# Altium PCB LinkIt Smart 7688 Duo.PcbDoc (part 3 of 3)
Units mil, origin at the board's own origin, x right, y up, seen from the top; angles counter-clockwise.
Board outline 2393.7 x 1023.62 mil, 4 copper layers (Top Layer, Mid Layer 1, Mid Layer 2, Bottom Layer), stack 40 mil thick; 184 components, 153 nets, 759 pads, 3026 vias.
Unrouted connection lines stored in the file: 1.
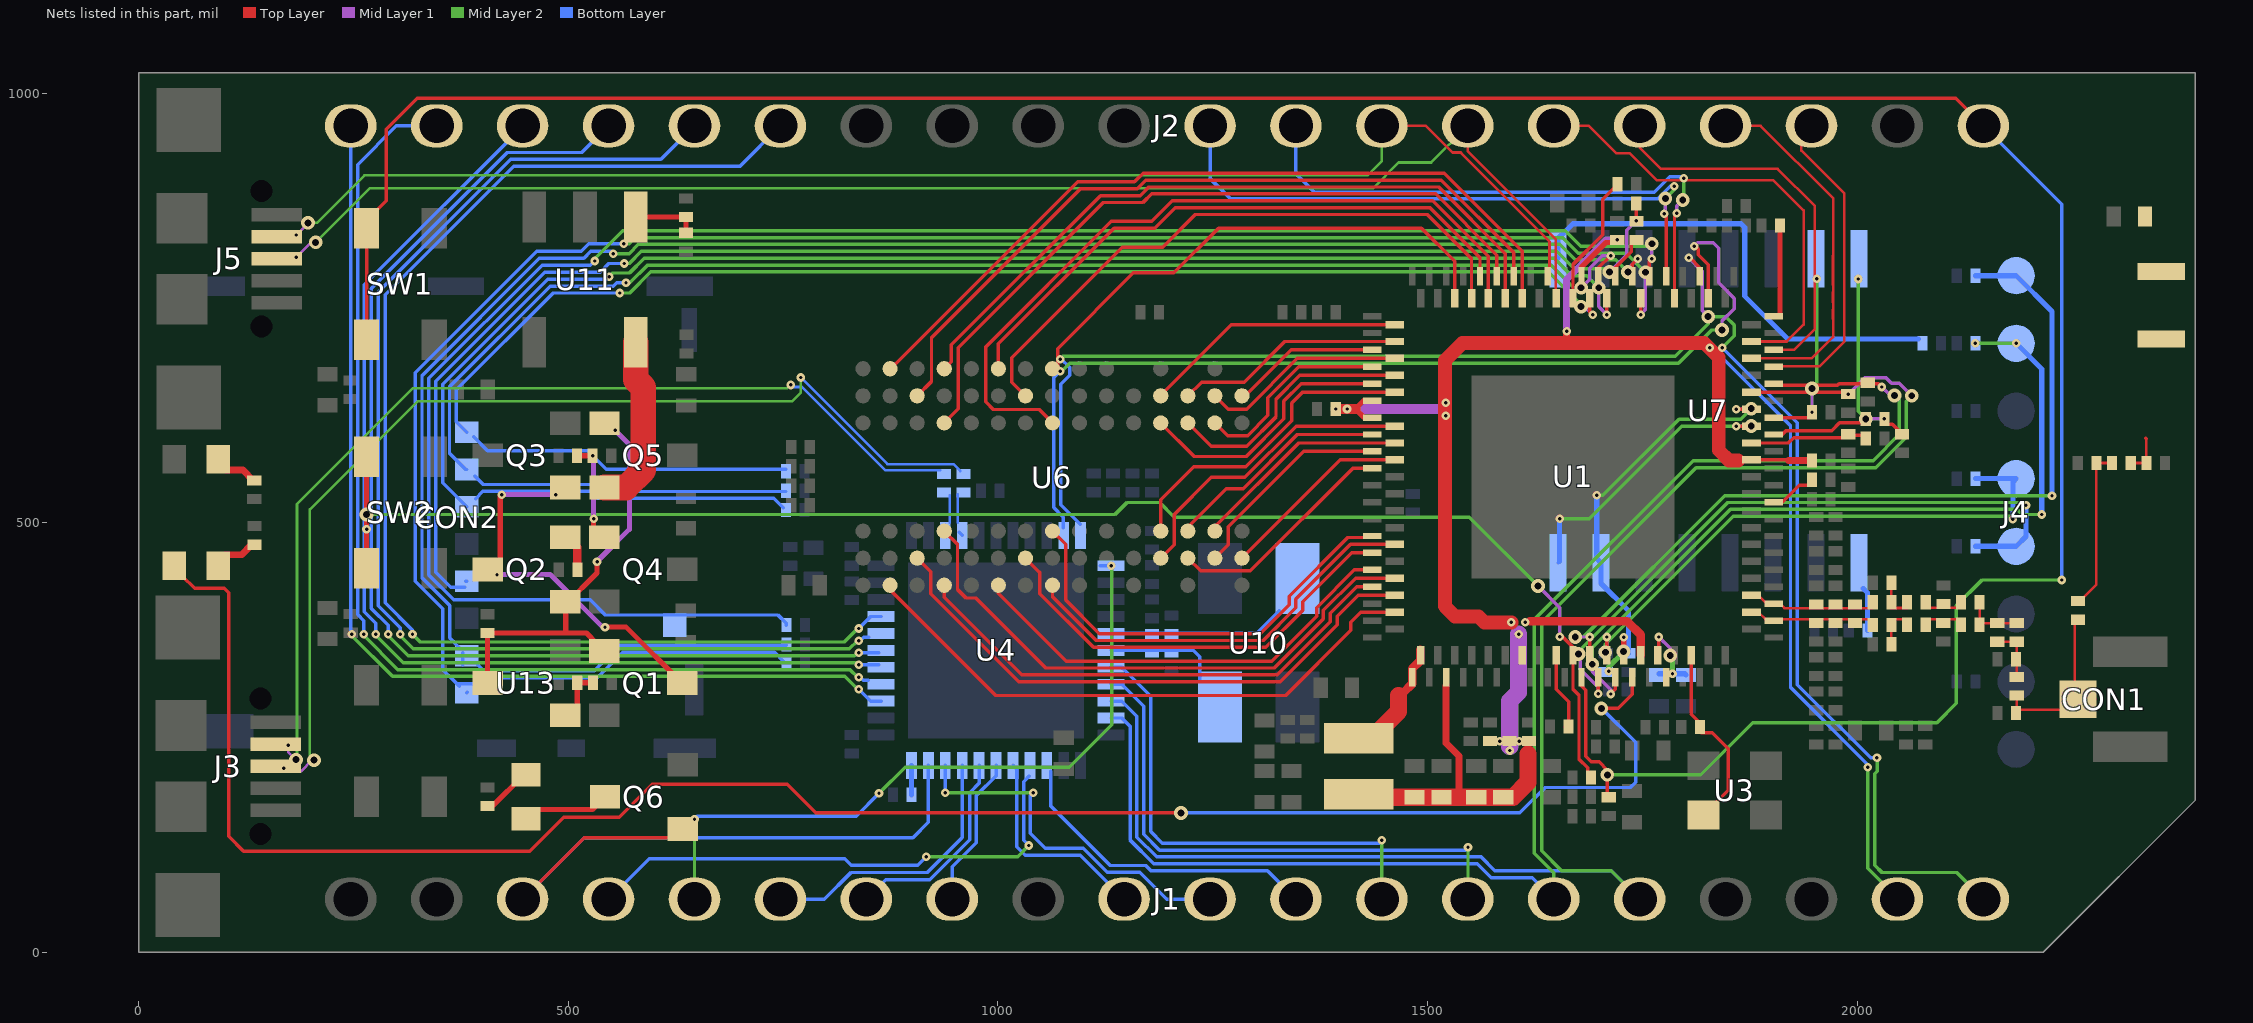
[diagram p5: the nets of this part, all layers, seen from the top]

## Via types
v1: diameter 10, hole 4, Mid Layer 2 to Bottom Layer, tented bottom, 916 vias
v2: diameter 10, hole 4, Top Layer to Mid Layer 1, tented top, 915 vias
v3: diameter 16, hole 8, Top Layer to Bottom Layer, tented both sides, 776 vias
v4: diameter 16, hole 8, Mid Layer 1 to Mid Layer 2, 419 vias

## Nets (pads, with @x,y where several pads share a name; then routed paths per layer and width w, separated by ;. In a path a pad name is that pad's centre, name@x,y a point inside that pad or via, vN(x,y) a via of type N, cw(c..) or ccw(c..) an arc to the next point about the centre after c; other vN are vias at no path point) (continued)
"GPIO16 / MDI_RP_P1": J1.22 U1.43 U4.10 | length 1937.6
  Top Layer w4: v2(1810.24,821.85) 1811.58,821.85 1815,818.43 1815,811.94 1826.77,800.16 U1.43@1826.77,761.02
  Mid Layer 1 w4: v2(1810.24,821.85) 1814.15,825.76 1832.51,825.76 1838.95,819.32 1838.95,778.96 1857.09,760.83 1856.72,760.46 1856.72,749.12 1842.72,735.12 v4(1842.72,724.21)
  Mid Layer 2 w4: v1(1072.36,676.22) 1074.21,676.22 1083.42,685.43 1792.04,685.43 1830.82,724.21 v4(1842.72,724.21) ; 1819.64,712.44 v1(1828.35,703.74) ; v1(2012.52,215.24) 2012.52,97.83 2046.85,63.5 J1.22@2046.85,61.81
  Bottom Layer w4: v1(1072.36,676.22) 1064.89,668.75 1064.89,517.6 1076.02,506.46 U4.10@1076.02,493.86 ; v1(1828.35,703.74) 1828.35,702.55 1838.36,692.54 1842.6,692.54 1922.4,612.74 1922.4,308.21 2012.52,218.1 v1(2012.52,215.24)
"GPIO17 / MDI_RN_P1": J1.21 U1.44 U4.11 | length 1989.2
  Top Layer w4: v2(1804,808.08) 1805.51,808.08 1816.93,796.65 U1.44@1816.93,786.81
  Mid Layer 1 w4: v2(1804,808.08) 1819.95,792.12 1819.95,746.39 v4(1826.57,739.76)
  Mid Layer 2 w4: v1(1072.48,690.32) 1075.59,693.43 1788.52,693.43 1826.57,731.48 v4(1826.57,739.76) 1846.96,739.76 1856.72,730.01 1856.72,717.35 v1(1842.91,703.54) ; v1@2021.65,226.18 v1(2023.03,226.18) 2023.52,225.69 2023.52,210.64 2020.52,207.64 2020.52,101.14 2028.85,92.81 2115.85,92.81 J1.21@2146.85,61.81
  Bottom Layer w4: v1(1072.48,690.32) 1073.82,690.32 1083.36,680.78 1083.36,671.36 1072.89,660.89 1072.89,520.93 U4.11@1095.87,497.95 ; v1(1842.91,703.54) 1930.43,616.03 1930.43,311.5 2015.75,226.18 v1(2023.03,226.18)
HOLD: R103.1 U7.1 | length 50.8
  Bottom Layer w6: U7.1@2007.05,423.31 2011.85,418.5 R103.1@2011.85,374.45
I2S_SDO: R2.2 U1.17 | length 50.5
  Top Layer w4: U1.17@1902.76,523.82 1912.8,523.82 1932.48,543.5 R2.2@1945.08,543.5
JCLK: J4.3 R25.2 U1.140 | length 771.9
  Top Layer w4: v2(1698.82,300.79) U1.140@1698.82,319.88
  Mid Layer 1 w4: v4(1675.59,347.24) 1677.73,345.1 1677.73,329.44 1698.82,308.35 v2(1698.82,300.79)
  Mid Layer 2 w4: v4(1675.59,347.24) 1675.59,349.7 1849.32,523.43 2193.5,523.43 v1(2196.46,520.47)
  Bottom Layer w6: R25.2@2137.6,472.44 J4.3@2185.04,472.44 2196.46,483.86 v1(2196.46,520.47)
JTDI: J4.6 R27.2 U1.142 | length 935.4
  Top Layer w4: v2(1713.19,300.59) 1718.5,305.91 U1.142@1718.5,319.88
  Mid Layer 1 w4: v4(1691.73,335.24) 1691.73,326.75 1713.19,305.29 v2(1713.19,300.59)
  Mid Layer 2 w4: v4(1691.73,335.24) 1691.73,354.53 1852.56,515.35 2185.99,515.35 2191.9,509.45 v1(2214.76,509.45) ; v1(2137.6,708.66) v1(2185.04,708.66)
  Bottom Layer w6: v1(2185.04,708.66) 2214.76,678.94 v1(2214.76,509.45)
JTMS: J4.4 R26.2 U1.141 | length 682.3
  Top Layer w4: U1.141@1708.66,345.67 v2(1708.66,366.93)
  Mid Layer 1 w4: v4(1706.89,349.21) 1708.66,350.98 v2(1708.66,366.93)
  Mid Layer 2 w4: v4(1706.89,349.21) 1706.89,358.37 1855.8,507.28 2178.15,507.28 v1(2181.3,504.13)
  Bottom Layer w6: R26.2@2137.6,551.18 J4.4@2185.04,551.18 2181.3,547.44 v1(2181.3,504.13)
JTRST_N: J4.7 R13.2 U1.139 | length 982.1
  Top Layer w4: U1.139@1688.98,345.67 v2(1688.98,366.93)
  Mid Layer 1 w4: v4(1671.85,366.93) v2(1688.98,366.93)
  Mid Layer 2 w4: v4(1671.85,366.93) 1681.51,366.93 1846.07,531.5 v1(2226.77,531.5)
  Bottom Layer w6: R13.2@2137.6,787.4 J4.7@2185.04,787.4 2226.77,745.67 v1(2226.77,531.5)
MADDR0: U1.80 U6.M8 | length 307
  Top Layer w4: U6.M8@1189.49,647.6 1189.49,648.43 1271.57,730.51 U1.80@1461.61,730.51
MADDR1: U1.88 U6.M3 | length 372.5
  Top Layer w4: U6.M3@1189.49,490.12 1189.49,526.5 1227.95,564.96 1288.27,564.96 1341.91,618.6 1341.91,639.27 1354.42,651.77 U1.88@1461.61,651.77
MADDR2: U1.87 U6.M7 | length 309.9
  Top Layer w4: U6.M7@1189.49,616.1 1189.49,615.78 1228.3,576.97 1288.97,576.97 1332.87,620.88 1332.87,641.54 1352.95,661.61 U1.87@1435.83,661.61
MADDR3: U1.97 U6.N2 | length 270.5
  Top Layer w4: U6.N2@1220.98,458.62 1235.84,443.76 1293.76,443.76 1413.19,563.19 U1.97@1435.83,563.19
MADDR4: U1.82 U6.N8 | length 266.8
  Top Layer w4: U6.N8@1220.98,647.6 1236.97,663.58 1286.61,663.58 1333.86,710.83 U1.82@1461.61,710.83
MADDR5: U1.93 U6.N3 | length 264.2
  Top Layer w4: U6.N3@1220.98,490.12 1220.98,494.8 1265.75,539.57 1285.51,539.57 1348.5,602.56 U1.93@1435.83,602.56
MADDR6: U1.86 U6.N7 | length 298.1
  Top Layer w4: U6.N7@1220.98,616.1 1248.11,588.98 1289.66,588.98 1323.62,622.94 1323.62,643.6 1351.47,671.46 U1.86@1461.61,671.46
MADDR7: U1.95 U6.P2 | length 247.1
  Top Layer w4: U6.P2@1252.48,458.62 1267.91,474.06 1267.91,495.07 1355.72,582.87 U1.95@1435.83,582.87
MADDR8: U1.84 U6.P8 | length 240
  Top Layer w4: U6.P8@1252.48,647.6 1267.99,632.09 1289.48,632.09 1348.53,691.14 U1.84@1461.61,691.14
MADDR9: U1.94 U6.P3 | length 254.6
  Top Layer w4: U6.P3@1252.48,490.12 1252.48,495.23 1349.97,592.72 U1.94@1461.61,592.72
MADDR10: U1.92 U6.M2 | length 356.4
  Top Layer w4: U6.M2@1189.49,458.62 1205.12,474.25 1205.12,509.45 1248.43,552.76 1287.38,552.76 1347.03,612.4 U1.92@1461.61,612.4
MADDR11: U1.85 U6.P7 | length 234.8
  Top Layer w4: U6.P7@1252.48,616.1 1267.34,601.24 1290.61,601.24 1314.17,624.8 1314.17,645.47 1350,681.3 U1.85@1435.83,681.3
MADDR12: U1.96 U6.R2 | length 225
  Top Layer w4: U6.R2@1283.98,458.62 1398.39,573.03 U1.96@1461.61,573.03
MADDR13: U1.83 U6.R8 | length 174
  Top Layer w4: U6.R8@1283.98,647.6 1287.95,647.6 1341.34,700.98 U1.83@1435.83,700.98
MDATA0: U1.71 U6.G8 | length 722.4
  Top Layer w4: U6.G8@1032.01,647.6 1016.14,663.46 1016.14,692.03 1144.71,820.6 1191.61,820.6 1229.64,858.62 1499.58,858.62 1551.18,807.02 U1.71@1551.18,761.02
MDATA1: U1.107 U6.G2 | length 512.9
  Top Layer w4: U6.G2@1032.01,458.62 1048.13,442.5 1048.65,442.5 1048.65,417.4 1111.22,354.83 1311.89,354.83 1354.83,397.78 1354.83,407.8 1411.8,464.76 U1.107@1435.83,464.76
MDATA2: U1.69 U6.H7 | length 883.3
  Top Layer w4: U6.H7@1063.5,616.1 1047.91,631.69 994.49,631.69 985.65,640.53 985.65,704.45 1131.8,850.6 1179.04,850.6 1203.07,874.62 1506.21,874.62 1570.87,809.96 U1.69@1570.87,761.02
MDATA3: U1.105 U6.H3 | length 505.1
  Top Layer w4: U6.H3@1063.5,490.12 1078.74,474.88 1078.74,409.94 1117.85,370.83 1305.26,370.83 1338.83,404.4 1338.83,414.43 1407.09,482.68 U1.105@1428.94,482.68
MDATA4: U1.106 U6.H1 | length 484.7
  Top Layer w4: U6.H1@1063.5,427.13 1063.5,413.86 1114.54,362.83 1308.57,362.83 1346.83,401.09 1346.83,411.11 1410.33,474.61 U1.106@1461.61,474.61
MDATA5: U1.73 U6.H9 | length 602
  Top Layer w4: U6.H9@1069.44,679.53 1069.44,702.35 1157.69,790.6 1204.68,790.6 1256.7,842.62 1492.95,842.62 1531.5,804.08 U1.73@1531.5,761.02
MDATA6: U1.109 U6.F1 | length 519.7
  Top Layer w4: U6.F1@1000.51,427.13 1000.51,417.9 1079.58,338.83 1318.51,338.83 1370.83,391.15 1370.83,401.17 1414.74,445.08 U1.109@1428.35,445.08
MDATA7: U1.70 U6.F9 | length 700.9
  Top Layer w4: U6.F9@1000.51,679.09 1000.51,708 1135.11,842.6 1182.36,842.6 1206.38,866.62 1502.89,866.62 1561.02,808.49 U1.70@1561.02,786.81
MDATA8: U1.66 U6.C8 | length 890.7
  Top Layer w4: U6.C8@906.02,647.6 922.66,664.24 922.66,715.19 1096.07,888.6 1162.23,888.6 1172.25,898.62 1516.15,898.62 1600.39,814.38 U1.66@1600.39,786.81
MDATA9: U1.112 U6.C2 | length 670.1
  Top Layer w4: U6.C2@906.02,458.62 922.05,442.6 922.05,417.23 1024.45,314.83 1328.45,314.83 1394.83,381.21 1394.83,391.23 1419.16,415.55 U1.112@1454.13,415.55
MDATA10: U1.68 U6.D7 | length 849.5
  Top Layer w4: U6.D7@937.52,616.1 953.74,632.32 953.74,703.65 1122.69,872.6 1168.85,872.6 1178.88,882.62 1509.52,882.62 1580.71,811.43 U1.68@1580.71,786.81
MDATA11: U1.110 U6.D3 | length 662.5
  Top Layer w4: U6.D3@937.52,490.12 952.95,474.68 952.95,422.18 962.86,412.27 974.34,412.27 1055.78,330.83 1321.83,330.83 1378.83,387.83 1378.83,397.86 1416.21,435.24 U1.110@1454.13,435.24
MDATA12: U1.111 U6.D1 | length 590.6
  Top Layer w4: U6.D1@937.52,427.13 937.52,413.07 1027.76,322.83 1325.14,322.83 1386.83,384.52 1386.83,394.54 1417.69,425.39 U1.111@1428.35,425.39
MDATA13: U1.67 U6.D9 | length 841.4
  Top Layer w4: U6.D9@937.52,684.27 U6.D9@937.52,679.09 945.74,687.32 945.74,706.97 1119.37,880.6 1165.54,880.6 1175.56,890.62 1512.83,890.62 1590.55,812.9 U1.67@1590.55,761.02
MDATA14: U1.114 U6.B1 | length 681.9
  Top Layer w4: U6.B1@874.53,427.13 874.53,421.64 997.34,298.83 1335.08,298.83 1410.83,374.58 1410.83,384.31 1422.39,395.87 U1.114@1454.13,395.87
MDATA15: U1.65 U6.B9 | length 922.4
  Top Layer w4: U6.B9@874.53,679.09 875.26,679.09 1092.76,896.6 1158.91,896.6 1168.94,906.62 1519.46,906.62 1610.24,815.85 U1.65@1610.24,761.02
NetANT1_1: ANT1.1 C6.2 C8.1 | length 47.4
  Top Layer w3: C6.2@2318.37,569.39 C8.1@2336.67,569.39 2336.67,597.58
  Top Layer w4: 2336.02,598.23 2336.67,597.58
NetANT1_2: ANT1.2 C9.1
NetC6_1: C6.1 C7.1 R233.1 | length 180.8
  Top Layer w3: R233.1@2263.58,412.99 2278.41,427.82 C7.1@2278.41,569.39 C6.1@2296.71,569.39
NetC18_1: C18.1 CON2.5 R12.2 | length 1795.2
  Top Layer w4: v2(1742.91,851.18) C18.1@1742.91,871.26
  Mid Layer 1 w4: v4(1711.81,791.73) 1731.89,811.81 1731.89,840.16 v2(1742.91,851.18)
  Mid Layer 2 w4: v1(565.2,801.57) 570.71,801.57 584.9,815.76 1650.54,815.76 1670.88,795.43 1708.12,795.43 v4(1711.81,791.73)
  Bottom Layer w4: CON2.5@379.41,424.88 363.23,424.88 345.73,442.38 345.73,664.55 472.72,791.54 537.2,791.54 547.24,801.57 v1(565.2,801.57) ; CON2.5@380.75,431.89 CON2.5@381.81,431.89
NetC186_1: C186.1 C190.1 L33.2 | length 47.6
  Top Layer w3: C190.1@2039.76,429.96 2039.76,400.67 C186.1@2058.11,400.67
NetC186_2: C186.2 C187.1 L32.2 | length 40.9
  Top Layer w3: C186.2@2079.84,400.75 C187.1@2120.79,400.75
NetC188_1: C188.1 C189.1 L30.2 L33.1 U1.5 U1.6 | length 137.7
  Top Layer w3: U1.6@1885.63,414.37 1894.29,405.71 1910.24,405.71 1915.35,400.59 L33.1@2017.64,400.59
NetC188_2: C188.2 C191.2 L31.2 L36.1 U1.3 U1.4 | length 133.5
  Top Layer w3: U1.4@1886.02,394.88 1893.31,387.6 L36.1@2016.54,387.6
NetC192_2: C192.2 C196.1 L36.2 | length 47.7
  Top Layer w3: C192.2@2039.76,358.43 2039.76,387.72 C196.1@2058.15,387.72
NetC196_2: C196.2 C197.1 L37.1 | length 40.9
  Top Layer w3: C196.2@2079.84,387.76 L37.1@2120.79,387.76
NetD1_1: D1.1 R21.1 | length 38.3
  Top Layer w8: D1.1@101.26,462.56 119.8,462.56 131.57,474.33 R21.1@134.68,474.33
NetD2_1: D2.1 R22.1 | length 38
  Top Layer w8: D2.1@101.42,561.1 121.26,561.1 133.19,549.17 R22.1@134.49,549.17
NetD3_1: D3.1 R35.1 | length 60
  Top Layer w6: R35.1@405.79,170.12 411.89,170.12 448.31,206.54 D3.1@450.71,206.54
NetD3_2: D3.2 Q6.2 | length 102.6
  Top Layer w6: D3.2@450.71,155.35 461.57,166.22 527.99,166.22 Q6.2@542.72,180.94
NetJ3_2: J3.2 R23.2 | length 1165.1
  Mid Layer 1 w3: v2(173.98,240.83) 173.98,233.31 v4(183.15,224.13)
  Mid Layer 2 w3: v4@184.21,224.13 184.21,521.61 318.9,656.3 754.72,656.3 v1(758.66,660.24)
  Bottom Layer w3: v1@761.02,657.87 771.85,657.87 868.7,561.02 R23.2@932.87,561.02
  Bottom Layer w4: v1(758.66,660.24) v1@761.02,657.87
NetJ3_3: J3.3 R24.2 | length 1211.9
  Mid Layer 1 w3: v2(168.74,214.09) 172.2,210.63 188.74,210.63 201.69,223.58 v4(203.98,223.58)
  Mid Layer 2 w3: v4(203.98,223.58) 199.21,228.35 199.21,515.4 325.11,641.3 760.67,641.3 770.47,651.1 v1(770.47,668.9)
  Bottom Layer w3: v1@770.61,669.01 871.51,568.11 948.23,568.11 R24.2@956.3,560.04
NetL24_1: L24.1 U1.118 U1.119 | length 136.4
  Top Layer w10: 1471.46,301.77 1482.28,312.6 U1.118@1482.28,319.88 1482.28,330.12 1491.54,339.37 U1.119@1491.54,352.17
  Top Layer w20: L24.1@1420.08,249.02 1435.04,249.02 1466.34,280.32 1466.34,298.82
NetQ1_1: Q1.1 Q2.1 Q5.1 R5.1 U13.3 | length 465
  Top Layer w6: U13.3@405.94,313.43 R5.1@405.94,371.65 497.05,371.65 ; v2(533.43,454.61) 533.43,441.3 497.05,404.92 497.05,371.65 ; Q1.1@533.58,359.09 521.02,371.65 497.05,371.65 ; Q5.1@542.13,615.75 542.13,615.39 Q5.1@542.17,615.35
  Mid Layer 1 w6: v2(533.43,454.61) 571.02,492.2 571.02,591.02 v2(554.41,607.64)
NetQ1_2: Q1.2 Q2.2 Q3.1 | length 408.1
  Top Layer w6: Q2.2@420.83,455.98 420.83,531.14 v2(422.32,532.64) ; v2(542.68,378.35) 567.32,378.35 Q1.2@632.4,313.27
  Mid Layer 1 w6: v2(416.97,439.49) 478.87,439.49 540.01,378.35 v2(542.68,378.35) ; v2(422.32,532.64) v2(485.43,532.64)
NetQ2_3: Q2.3 R34.1 | length 26.3
  Top Layer w10: R34.1@510.55,445.16 Q2.3@510.55,471.42
NetQ4_1: Q4.1 R30.2 R31.1 | length 100.9
  Top Layer w6: R30.2@510.04,577.76 v2(528.35,577.76) ; Q4.1@529.37,495.63 v2(529.37,504.49)
  Mid Layer 1 w6: v2(528.35,577.76) 529.37,576.73 v2(529.37,504.49)
NetQ5_3: Q5.3 U11.5 | length 206.1
  Top Layer w30: Q5.3@542.13,540.94 567.17,540.94 587.28,561.06 587.28,657.6 578.54,666.34 U11.5@578.54,710.04
NetR4_2: R4.2 R11.1 U11.1 | length 79
  Top Layer w6: U11.1@578.54,855.71 R4.2@636.81,855.71 R11.1@636.81,837.4 R11.1@634.39,837.4
NetR6_2: R6.2 R8.1 U13.1 | length 45.2
  Top Layer w6: U13.1@510.47,286.89 R8.1@510.47,313.66 R6.2@528.86,313.66
NetR7_2: R7.2 U4.33 | length 34.3
  Bottom Layer w6: R7.2@899.41,183.27 U4.33@899.41,217.52
NetR23_1: R23.1 U4.3 | length 32.1
  Bottom Layer w3: U4.3@943.9,500 R23.1@943.9,532.09
NetR24_1: R24.1 U4.4 | length 38.1
  Bottom Layer w3: U4.4@953.15,499.8 R24.1@953.15,532.87
  Bottom Layer w4: U4.4@954.92,488.78 U4.4@958.46,485.24
NetR29_2: R29.2 U1.143 | length 67.6
  Top Layer w6: U1.143@1728.35,345.67 v2(1728.35,366.73)
  Mid Layer 1 w6: v4@1728.35,350.2 v2(1728.35,366.73)
  Mid Layer 2 w6: v1(1710.75,327.17) 1710.75,331.86 1728.15,349.26 v4(1728.15,350)
NetR52_2: R52.2 U1.59 | length 154.4
  Top Layer w4: U1.59@1669.29,761.02 1669.29,800.39 1703.94,835.04 1703.94,876.6 R52.2@1721.26,893.9
NetR83_2: R83.2 U1.39 | length 103.1
  Top Layer w6: U1.39@1910.24,742.72 R83.2@1910.24,845.87
OSC_IN: C24.1 R15.1 U4.17 U10.1 | length 134.6
  Bottom Layer w4: U4.17@1131.69,351.38 1227.17,351.38 1234.65,343.9 U10.1@1234.65,315.35
OSC_OUT: C23.1 R15.2 U4.16 U10.3 | length 206.9
  Bottom Layer w4: U4.16@1131.69,371.06 1300.98,371.06 U10.3@1327.56,397.64
PB4: J1.33 U4.28 | length 176.8
  Bottom Layer w4: J1.33@946.85,61.81 946.85,99.34 975,127.49 975,182.48 997.83,205.32 U4.28@997.83,217.52
PB5: J1.34 U4.29 | length 240.1
  Bottom Layer w4: J1.34@846.85,61.81 869.29,84.25 920.45,84.25 967,130.8 967,185.79 978.15,196.94 U4.29@978.15,217.52
PB6: J1.35 U4.30 | length 325.3
  Bottom Layer w4: J1.35@746.85,61.81 798.01,61.81 829.01,92.81 917.7,92.81 958.46,133.58 U4.30@958.46,217.52
PB7: J1.36 U4.12 | length 821.9
  Mid Layer 2 w4: J1.36@646.85,61.81 v1(646.85,154.92) ; v1(861.61,185.04) 892.13,215.55 1083.12,215.55 1132.46,264.89 1132.46,449.04 v1(1131.69,449.8)
  Bottom Layer w4: v1(646.85,154.92) 650.27,158.34 834.91,158.34 v1(861.61,185.04) ; U4.12@1119.29,449.8 v1(1131.69,449.8)
PC6: J1.30 U4.31 | length 423.6
  Mid Layer 2 w4: v1(938.78,185.43) v1(1041.14,185.43)
  Bottom Layer w4: v1(938.78,185.43) U4.31@938.78,217.52 ; v1(1041.14,185.43) 1037.85,182.14 1037.85,138.33 1055.12,121.06 1099.18,121.06 1127.32,92.92 1165.15,92.92 1196.26,61.81 J1.30@1246.85,61.81
PC7: J1.38 Q6.1 U4.32 | length 795.8
  Top Layer w4: J1.38@446.85,61.81 518.46,133.43 623.15,133.43 Q6.1@633.27,143.54
  Bottom Layer w4: J1.38@446.85,61.81 518.5,133.46 901.18,133.46 919.09,151.38 U4.32@919.09,217.52
PD0: J1.28 U4.18 | length 561.7
  Mid Layer 2 w4: J1.28@1446.85,61.81 v1(1446.85,130.12)
  Bottom Layer w4: U4.18@1131.69,331.69 1143.9,331.69 1177.74,297.85 1177.74,140.57 1191.35,126.95 1443.69,126.95 v1(1446.85,130.12)
PD1: J1.27 U4.19 | length 644.2
  Mid Layer 2 w4: J1.27@1546.85,61.81 1547.05,62.01 v1(1547.05,122.05)
  Bottom Layer w4: U4.19@1131.69,312.01 1143.9,312.01 1169.74,286.17 1169.74,137.25 1188.04,118.95 1543.95,118.95 v1(1547.05,122.05)
PD4: J1.29 U4.25 | length 370.6
  Bottom Layer w4: U4.25@1061.22,210.43 1061.22,170.44 1130.67,100.99 1172.06,100.99 1178.1,94.95 1313.71,94.95 J1.29@1346.85,61.81
PD6: J1.37 U4.26 | length 607.6
  Mid Layer 2 w4: v1(916.34,111.22) 1023.03,111.22 v1(1036.02,124.21)
  Bottom Layer w4: J1.37@546.85,61.81 594.09,109.06 821.65,109.06 829.33,101.38 906.5,101.38 v1(916.34,111.22) ; v1(1036.02,124.21) 1029.85,130.39 1029.85,198.35 U4.26@1036.61,205.12
PD7: J1.31 U4.27 | length 246.8
  Bottom Layer w4: U4.27@1017.52,217.52 1021.85,213.19 1021.85,122.83 1031.88,112.8 1095.87,112.8 J1.31@1146.85,61.81
PERST_N: R91.2 U1.135 | length 90.7
  Top Layer w4: U1.135@1649.61,345.67 1649.61,306.1 1664.17,291.54 1664.17,266.54 R91.2@1660.24,262.6
PF0: J2.15 U4.41 | length 1511.2
  Mid Layer 2 w4: v1(318.62,370.12) 327.66,361.08 820.92,361.08 836.61,376.77 v1(838.19,376.77)
  Bottom Layer w4: v1(318.62,370.12) 318.62,374.96 286.72,406.86 286.72,765.07 436.46,914.81 699.85,914.81 J2.15@746.85,961.81 ; v1(838.19,376.77) 852.17,390.75 U4.41@863.98,390.75
PF1: J2.16 U4.40 | length 1416.3
  Mid Layer 2 w4: v1(304.33,370.2) 304.33,368.5 319.76,353.08 827.1,353.08 836.62,362.6 v1(837.99,362.6)
  Bottom Layer w4: v1(304.33,370.2) 304.33,377.83 278.72,403.44 278.72,768.38 433.15,922.81 607.85,922.81 J2.16@646.85,961.81 ; v1(837.99,362.6) 839.57,362.6 843.71,366.73 U4.40@849.8,366.73
PF4: J2.17 U4.39 | length 1348.7
  Mid Layer 2 w4: v1(290.28,370.2) 290.28,368.39 313.58,345.08 833.07,345.08 836.54,348.55 v1(838.13,348.55)
  Bottom Layer w4: v1(290.28,370.2) 290.28,380.51 270.72,400.06 270.72,772.53 429.01,930.81 515.85,930.81 J2.17@546.85,961.81 ; v1(838.13,348.55) U4.39@861.15,348.55
PF5: J2.18 U4.38 | length 1274
  Mid Layer 2 w4: v1(276.1,370.28) 276.1,368.7 307.79,337.01 835.43,337.01 v1(837.99,334.45)
  Bottom Layer w4: v1(276.1,370.28) 276.1,383.15 262.72,396.53 262.72,776.9 J2.18@447.24,961.42 ; v1(837.99,334.45) U4.38@861.22,334.45
PF6: J2.19 U4.37 | length 1270.7
  Mid Layer 2 w4: v1(262.01,370.32) 262.01,368.7 301.69,329.01 827.87,329.01 836.61,320.28 v1(837.99,320.28)
  Bottom Layer w4: v1(262.01,370.32) 262.01,385.83 254.72,393.11 254.72,916.61 299.92,961.81 J2.19@346.85,961.81 ; v1(837.99,320.28) 839.38,320.28 843.31,316.34 U4.37@849.21,316.34
PF7: J2.20 U4.36 | length 1241.5
  Mid Layer 2 w4: v1(247.95,370.32) 247.95,368.43 295.36,321.01 821.7,321.01 836.61,306.1 v1(837.99,306.1)
  Bottom Layer w4: J2.20@246.85,961.81 246.72,961.68 246.72,371.54 v1(247.95,370.32) ; v1(837.99,306.1) 851.77,292.32 U4.36@863.98,292.32
PORST_N: J2.1 R236.2 SW1.3 SW1.4 U1.138 | length 3548.6
  Top Layer w4: SW1.4@262.83,718.23 265.28,720.67 265.28,851.77 288.15,874.65 288.15,957.95 323.98,993.78 2114.88,993.78 J2.1@2146.85,961.81 ; U1.138@1679.13,319.88 1679.13,310.04 1684.28,304.9 1684.28,228.13 1690.75,221.65 1699.61,221.65 1709.25,212.01 R236.2@1709.25,181.69
  Mid Layer 2 w4: v3(1709.25,206.5) 1818.11,206.5 1878.54,266.93 2092.91,266.93 2115.55,289.57 2115.55,403.54 2145.28,433.27 v1(2237.99,433.27)
  Bottom Layer w4: J2.1@2146.85,961.81 2237.99,870.67 v1(2237.99,433.27)
RFOUT_G0: C194.2 C195.1 L34.2 L35.1 | length 63.6
  Top Layer w3: L34.2@2162.99,361.42 C194.2@2185.63,361.42 L35.1@2185.63,320.47
RFOUT_G0_L: C187.2 C194.1 L34.1 L37.2 | length 67.3
  Top Layer w3: L37.2@2142.44,383.03 C187.2@2142.44,405.67 ; L37.2@2144.09,383.07 C194.1@2185.63,383.07
  Top Layer w4: L37.2@2142.44,381.06 L37.2@2144.65,383.27
RXIN0: J2.4 U1.34 | length 426.9
  Top Layer w3: J2.4@1846.85,961.81 1887.69,961.81 1971.92,877.58 1971.92,810.41 1971.89,777.01 1971.92,768.29 ; U1.34@1876.97,691.14 1947.08,691.14 1971.92,715.97 1971.92,737.22 1971.89,747.6 ; 1971.92,747.62 1971.92,756.32 1971.89,768.26
RXIP0: J2.3 U1.33 | length 370.9
  Top Layer w3: U1.33@1902.76,681.89 1956.24,681.89 1985.04,710.69 1985.04,883.01 1935.11,932.94 1935.11,950.07 J2.3@1946.85,961.81
SD_CD: CON2.10 R10.1 U1.50 | length 2214
  Top Layer w4: U1.50@1757.87,786.81 1757.87,804.13 v2(1760.83,807.09)
  Mid Layer 1 w4: v2(1760.83,807.09) 1760.83,824.41 v4(1761.02,824.61)
  Mid Layer 2 w4: v1(530.59,804.49) 530.59,807.24 563.11,839.76 1660.48,839.76 1678.52,821.73 1758.15,821.73 v4(1761.02,824.61)
  Bottom Layer w4: v1(530.59,804.49) 525.75,799.65 469.52,799.65 337.73,667.86 337.73,439.04 366.69,410.08 525.43,410.08 543.03,392.48 744.02,392.48 753.78,382.72 R10.1@753.78,380.75
SD_CLK: R12.1 U1.54 | length 48.2
  Top Layer w4: U1.54@1718.5,786.81 1718.5,796.85 1737.01,815.35 R12.1@1737.01,827.36
SD_CMD: CON2.3 R18.1 U1.55 | length 1998.3
  Top Layer w4: v2(1708.66,742.13) U1.55@1708.66,761.02
  Mid Layer 1 w4: v4(1699.21,773.43) 1699.21,751.57 v2(1708.66,742.13)
  Mid Layer 2 w4: v1(547.6,786.38) 551.74,790.52 571.22,790.52 588.46,807.76 1647.23,807.76 1667.57,787.43 1685.21,787.43 v4(1699.21,773.43)
  Bottom Layer w4: CON2.3@381.81,518.5 353.73,546.58 353.73,661.23 475.92,783.43 544.65,783.43 v1(547.6,786.38) ; CON2.3@392.13,528.03 400.43,536.34 525.55,536.34 533.67,528.22 739.26,528.22 R18.1@750.2,517.28
SD_D0: CON2.7 R19.1 U1.52 | length 2250.8
  Top Layer w4: U1.52@1738.19,786.81 1738.19,800.79 v2(1744.49,807.09)
  Mid Layer 1 w4: v4(1733.07,791.73) 1733.07,795.67 v2(1744.49,807.09)
  Mid Layer 2 w4: v1(552.44,813.11) 570.86,813.11 581.51,823.76 1653.86,823.76 1671.89,805.73 1719.07,805.73 v4(1733.07,791.73)
  Bottom Layer w4: CON2.7@372.99,354.61 361.89,365.71 361.89,403.55 329.73,435.71 329.73,671.17 466.39,807.83 518.26,807.83 526.13,815.71 549.84,815.71 v1(552.44,813.11) ; CON2.7@376.93,334.68 CON2.7@376.93,348.46 ; CON2.7@381.77,345.31 CON2.7@381.81,345.28 ; CON2.7@392.32,336.69 401.54,327.48 530.12,327.48 559.8,357.17 R19.1@753.78,357.17
SD_D1: CON2.8 R20.1 U1.51 | length 2371.8
  Top Layer w4: v2(1748.03,742.13) U1.51@1748.03,761.02
  Mid Layer 1 w4: v2(1748.03,742.13) 1753.54,747.64 v4(1753.54,791.34)
  Mid Layer 2 w4: v1(564.41,824.65) 571.01,824.65 578.13,831.76 1657.17,831.76 1675.2,813.73 1731.15,813.73 v4(1753.54,791.34)
  Bottom Layer w4: CON2.8@370.01,312.6 395.12,312.6 402,319.48 533.81,319.48 563.39,349.06 740.01,349.06 R20.1@750.81,338.25 ; CON2.8@373.39,309.49 353.86,329.02 353.86,399.57 321.73,431.7 321.73,674.49 463.27,816.02 515.11,816.02 523.73,824.65 v1(564.41,824.65) ; CON2.8@381.81,301.97 CON2.8@382.48,302.64
SD_D2: CON2.1 R16.1 U1.57 | length 1855.6
  Top Layer w4: U1.57@1688.98,761.02 1688.98,744.88 v2(1692.13,741.73)
  Mid Layer 1 w4: v4(1678.54,751.38) 1682.48,751.38 v2(1692.13,741.73)
  Mid Layer 2 w4: v1(559.84,767.24) 571.26,767.24 595.78,791.76 1640.6,791.76 1678.54,753.82 v4(1678.54,751.38)
  Bottom Layer w4: CON2.1@381.81,605.12 369.73,617.2 369.73,654.61 482.37,767.24 v1(559.84,767.24) ; CON2.1@389.76,599.8 405.94,583.62 522.76,583.62 544.25,562.13 R16.1@753.35,562.13
SD_D3: CON2.2 R17.1 U1.56 | length 1948.2
  Top Layer w4: U1.56@1698.82,786.81 1698.82,796.46 v2(1712.99,810.63)
  Mid Layer 1 w4: v4(1678.74,773.43) 1688.58,783.27 1688.58,795.87 1703.35,810.63 v2(1712.99,810.63)
  Mid Layer 2 w4: v1(567.13,779.29) 571.64,779.29 592.12,799.76 1643.92,799.76 1670.26,773.43 v4(1678.74,773.43)
  Bottom Layer w4: CON2.2@381.81,561.81 380.51,561.81 361.73,580.59 361.73,657.92 479.17,775.35 552.32,775.35 556.25,779.29 v1(567.13,779.29) ; CON2.2@391.18,554.25 401.02,544.41 529.06,544.41 537.25,536.22 R17.1@753.35,536.22
SFLASH_CLK: SR1.2 U1.25 | length 114
  Top Layer w4: U1.25@1902.76,602.56 1912.6,602.56 1917.13,607.09 1970.48,607.09 1979.43,616.04 SR1.2@2011.22,616.04
SOC_1.2VD_MT7628: C71.1 C87.1 C91.1 C92.1 C93.1 C94.1 C95.1 C96.1 C97.1 C337.1 L24.2 U1.22 U1.58 U1.89 U1.91 U1.122 U1.131 U1.145 | length 1985.9
  Top Layer w4: U1.22@1876.97,573.03 1919.68,573.03
  Top Layer w6: U1.91@1435.83,622.24 1425.98,622.24 1415.94,632.28 1425.59,641.93 U1.89@1435.83,641.93 ; U1.58@1679.13,786.81 1679.13,797.51 1707.81,826.18 C97.1@1714.76,826.18
  Top Layer w8: U1.122@1521.65,310.43 1521.65,243.31 1536.61,228.35 1536.61,180.87 ; 1661.81,709.45 v2(1661.81,722.64) ; 1920.28,572.44 C95.1@1947.44,572.44
  Top Layer w10: 1618.9,385.04 1732.48,385.04 1748.03,369.49 U1.145@1748.03,345.67
  Top Layer w12: v2(1393.11,632.28) v2(1406.3,632.28) 1415.94,632.28
  Top Layer w16: v2(1597.64,383.86) 1566.34,383.86 1559.45,390.75 1532.09,390.75 1520.28,402.56 1520.28,688.78 1540.55,709.06 1822.05,709.06 1838.98,692.13 1838.98,584.25 1850.79,572.44 1861.61,572.44
  Top Layer w20: L24.2@1435.04,180.47 C337.1@1484.76,180.47 C87.1@1516.26,180.47 1599.37,180.47 1616.73,197.83 1616.73,230.51
  Mid Layer 1 w8: v2(1661.81,722.64) 1661.81,783.24 1707.71,829.13 v2(1720.67,829.13)
  Mid Layer 1 w12: v2(1393.11,632.28) v2(1406.3,632.28) 1521.06,632.28 ; v2(1521.06,624.61) 1521.06,632.28 ; v2(1521.06,639.37) 1521.06,632.28
  Mid Layer 1 w20: v2@1595.67,239.37 1595.67,292.32 1605.91,302.56 v2(1605.91,370.28)
  other v2: 1595.47,234.84 1584.05,245.67 1606.89,245.67 1613.78,384.06
SPI_CLK: R90.2 SR1.1 U7.16 | length 206.5
  Top Layer w4: SR1.1@2034.45,614.37 2041.14,614.37 R90.2@2049.41,606.1
  Mid Layer 1 w4: v4(2010.04,620.67) v2(2031.69,620.67)
  Mid Layer 2 w4: v1@2001.18,783.43 2001.18,629.53 v4(2010.04,620.67)
  other v1: 2001.18,783.54
SPI_CS0: R102.1 U1.28 U7.7 | length 457.2
  Top Layer w4: v2(1859.06,632.09) U1.28@1876.97,632.09
  Mid Layer 1 w4: v2(1859.06,632.09) 1876.18,632.09 v4(1876.77,632.68)
  Mid Layer 2 w4: v1(1696.89,531.69) 1703.92,531.69 1792.63,620.4 1864.5,620.4 v4(1876.77,632.68) v4@1877.17,632.28
  Bottom Layer w6: v1(1696.89,531.69) 1696.89,458.15 U7.7@1701.97,453.07 1701.97,429.29 1733.9,397.36 R102.1@1733.9,347.95
SPI_CS1: R94.2 R96.2 U1.24 | length 130.9
  Top Layer w4: U1.24@1876.97,592.72 1919.69,592.72 1925.94,598.98 1982.24,598.98 1985.04,601.77 R96.2@2004.13,601.77
SPI_MISO: U1.26 U7.8 | length 355.6
  Top Layer w4: v2(1859.06,612.4) U1.26@1876.97,612.4
  Mid Layer 1 w4: v2(1859.06,612.4) v4(1876.77,612.4)
  Mid Layer 2 w4: v1(1653.74,504.65) 1688.19,504.65 1795.94,612.4 v4(1876.77,612.4)
  Bottom Layer w4: U7.8@1651.97,453.07 U7.8@1653.74,454.84
  Bottom Layer w6: U7.8@1653.74,454.84 v1(1653.74,504.65)
SPI_MOSI: R88.2 U1.27 U7.15 | length 198.5
  Top Layer w4: U1.27@1902.76,622.24 R88.2@1944.09,622.24
  Mid Layer 1 w4: v2(1947.44,628.54) v4(1947.44,656.1)
  Mid Layer 2 w4: v4(1947.44,656.1) 1952.78,661.44 v1@1952.78,783.54
  other v1: 1952.8,783.62
TXON0: J2.6 U1.36 | length 533.1
  Top Layer w3: J2.6@1646.85,961.81 1687.8,961.81 1719.59,930.02 1735.2,930.02 1766.6,898.62 1902.23,898.62 1937.59,863.25 1937.59,730.45 1917.97,710.83 U1.36@1876.97,710.83
TXOP0: J2.5 U1.35 | length 458.6
  Top Layer w3: J2.5@1746.85,961.81 1746.85,936.81 1771.85,911.81 1907.48,911.81 1950.79,868.5 1950.79,725.2 1926.57,700.98 U1.35@1902.76,700.98
"UART_RX1 / TXD1": J1.26 R39.1 U1.31 U4.21 | length 1718.6
  Top Layer w4: U1.31@1907.68,659.84 1977.12,659.84 1978.9,661.62 2024.8,661.62 v2(2028.54,657.87)
  Mid Layer 1 w4: v2(2028.54,657.87) 2038.39,648.03 v4(2043.31,648.03)
  Mid Layer 2 w4: J1.26@1646.85,61.81 1646.85,92.62 1624.41,115.06 1624.41,387.3 1809.09,571.98 2018.54,571.98 2049.21,602.65 2049.21,642.13 v4(2043.31,648.03)
  Bottom Layer w4: U4.21@1131.69,272.64 1144.09,272.64 1153.74,262.99 1153.74,130.63 1181.41,102.95 1557.68,102.95 1574.02,86.61 1622.05,86.61 J1.26@1646.85,61.81
UART_RXD1: U1.148
UART_RXD2: J2.10 U1.48 | length 733.4
  Top Layer w4: v2(1775.59,859.65) 1777.56,857.68 U1.48@1777.56,786.81
  Mid Layer 1 w4: v2(1775.59,859.65) 1776.77,860.83 v4(1776.77,877.17)
  Mid Layer 2 w4: v4@1776.77,871.46 v4(1776.77,877.17) 1787.09,887.48 v1(1787.09,891.46)
  Bottom Layer w4: J2.10@1246.85,961.81 1246.85,900.51 1270.63,876.73 1767.76,876.73 1782.48,891.46 v1(1787.09,891.46)
UART_TXD0: J1.25 R89.2 U1.30 U4.20 | length 1965.6
  Top Layer w4: U1.30@1876.97,651.77 1987.4,651.77 R89.2@1989.57,649.61
  Mid Layer 1 w4: v2(1989.76,649.21) 2009.43,668.87 2033.1,668.87 2039.94,662.03 2049.11,662.03 2063.5,647.64 v4(2063.58,647.64)
  Mid Layer 2 w4: J1.25@1746.85,61.81 1713.78,94.88 1655.91,94.88 1632.68,118.11 1632.68,384.25 1812.4,563.98 2021.85,563.98 2057.24,599.37 2057.24,641.3 v4(2063.58,647.64)
  Bottom Layer w4: U4.20@1131.69,292.32 U4.20@1143.9,292.32 ; U4.20@1144.09,292.32 U4.20@1143.9,292.32 ; J1.25@1746.85,61.81 1713.78,94.88 1578.31,94.88 1562.24,110.95 1184.73,110.95 1161.74,133.94 1161.74,274.48 U4.20@1143.9,292.32
UART_TXD1: R3.2 R95.2 U1.147 | length 101.2
  Top Layer w4: U1.147@1769.29,347.24 v2(1769.29,366.93)
  Mid Layer 1 w4: v2(1769.29,366.93) 1782.48,353.74 v4(1782.48,345.47)
  Mid Layer 2 w6: v4(1782.48,345.47) 1785.08,342.87 v1(1785.08,324.13)
  Bottom Layer w6: R95.2@1769.25,324.13 v1(1785.08,324.13) 1799.29,324.13 R3.2@1800.79,322.64
UART_TXD2: J2.9 U1.47 | length 668
  Top Layer w4: U1.47@1787.4,761.02 1787.4,857.09 v2(1790.16,859.84)
  Mid Layer 1 w4: v2(1790.16,859.84) 1790.16,868.5 v4(1797.05,875.39)
  Mid Layer 2 w4: v4(1797.05,875.39) 1798.09,876.43 1798.09,900.77 v1(1797.99,900.87)
  Bottom Layer w4: J2.9@1346.85,961.81 1346.85,906.3 1368.42,884.73 1764.06,884.73 1781.93,902.6 1796.26,902.6 v1(1797.99,900.87)
USB_DM: J2.8 J5.2 U1.62 | length 1632.6
  Top Layer w3: J2.8@1446.85,961.81 1498.01,961.81 1529.01,930.81 1538.48,930.81 1539.85,929.44 1539.85,929.19 1641.93,827.11 1641.93,788.98 U1.62@1639.76,786.81
  Mid Layer 1 w3: v2(183.5,834.76) 197.01,848.27 v4(197.01,848.94)
  Mid Layer 2 w3: v4(197.01,848.94) 207.44,848.94 262.75,904.24 1430.31,904.24 1446.85,920.79 J2.8@1446.85,961.81
USB_DP: J2.7 J5.3 U1.61 | length 1665.1
  Top Layer w3: J2.7@1546.85,961.81 1546.85,932.09 1649,829.93 U1.61@1649,765.55
  Mid Layer 1 w3: v2(183.58,809.09) 200.71,826.22 v4(205.94,826.22)
  Mid Layer 2 w3: v4(205.94,826.22) 268.81,889.09 1436.38,889.09 1466.42,919.13 1504.17,919.13 J2.7@1546.85,961.81
WF0_IPA: C193.1 CON1.1 L35.2 R233.2 | length 192.5
  Top Layer w3: C193.1@2185.04,278.35 C193.1@2185.63,278.94 ; L35.2@2185.63,298.82 C193.1@2185.63,278.94 ; CON1.1@2246.85,282.28 2188.98,282.28 C193.1@2185.63,278.94 ; CON1.1@2253.35,295.67 R233.2@2253.35,388.19
  Top Layer w4: CON1.1@2264.76,282.68 CON1.1@2276.57,294.49
WLED_N: D1.2 U1.144 | length 2219
  Top Layer w4: D1.2@50.67,437.83 65.04,423.46 99.65,423.46 104.76,418.35 104.76,134.96 121.97,117.76 455.28,117.76 494.57,157.05 559.25,157.05 597.76,195.55 754.86,195.55 788.21,162.2 v3(1212.99,162.2) ; v3(1702.26,283.79) 1721.78,283.79 1738.19,300.2 U1.144@1738.19,319.88
  Bottom Layer w4: v3(1212.99,162.2) 1607.48,162.2 1637.01,191.73 1736.02,191.73 1742.32,198.03 1742.32,244.31 v3@1703.02,283.61 ; v3(1702.26,283.79) 1703.2,283.79 v3@1705.08,285.67
WP: SR2.1 U7.9 | length 552
  Bottom Layer w6: U7.9@1651.97,807.4 1651.97,830.63 1669.25,847.91 1864.66,847.91 1869.17,843.4 1869.17,763.58 1918.86,713.9 SR2.1@2071.3,713.9
WPS_RST_PBC: R234.2 SW2.3 SW2.4 U1.137 | length 1806.5
  Top Layer w4: v2(1653.94,367.13) 1657.09,367.13 1669.29,354.92 U1.137@1669.29,345.67 1669.29,305.91 1676.28,298.92 1676.28,224.81 1686.42,214.67 1686.42,207.48 R234.2@1690.35,203.54
  Top Layer w6: SW2.4@265.16,446.85 v2(265.16,492.52) SW2.3@265.16,576.77
  Mid Layer 1 w4: v2(265.16,492.52) v4(265.16,509.45) ; v4(1628.54,426.38) 1653.94,400.98 v2(1653.94,367.13)
  Mid Layer 2 w4: v4(265.16,509.45) 1136.22,509.45 1150.2,523.43 1188.38,523.43 1205.31,506.5 1548.43,506.5 v4(1628.54,426.38)
XIN: C39.1 U1.151 U3.1 | length 209.7
  Top Layer w4: U1.151@1807.09,345.67 1807.09,276.97 C39.1@1816.14,267.91 ; C39.1@1818.31,255.71 1831.1,255.71 1849.8,237.01 1849.8,188.39 U3.1@1821.26,159.84
pads on no net: CON2.12 J3.0 J3.4 J5.0 J5.4 U1.9 U1.11 U1.12 U1.18 U1.20 U1.21 U1.29 U1.37 U1.45 U1.46 U1.126 U1.127 U1.129 U1.130 U1.132 U1.133 U1.136 U1.153 U4.2 U4.22 U6.A2 U6.A8 U6.E2 U6.E8 U6.R3 U6.R7 U7.3 U7.4 U7.5 U7.6 U7.11 U7.12 U7.13 U7.14 U11.3

## Polygon pours and split planes (outlines as drawn)
GND on Mid Layer 1 "Mid Layer 1 - GND" (solid, pour order 4): 0,1023.62 2393.7,1023.62 2393.7,177.17 2216.54,0 0,0
GND on Mid Layer 2 "Mid Layer 2 - GND" (solid, pour order 6): 0,1023.62 2393.7,1023.62 2393.7,177.17 2216.54,0 0,0
GND on Bottom Layer "Bottom Layer - GND" (solid, pour order 8): 0,1023.62 2393.7,1023.62 2393.7,177.17 2216.54,0 0,0
GND on Top Layer "Top Layer - GND" (solid, pour order 2): 0,1023.62 2393.7,1023.62 2393.7,177.17 2216.54,0 0,0

## Keep-outs
Keep-Out Layer:
  the board outline again, w4

## Other copper
Top Layer:
  rectangle net GND: 2349.86,910.43 2387.21,918.22
  rectangle net GND: 2350.59,578.05 2387.2,595.47
  rectangle net GND: 1544.77,208.46 1600.79,225
  rectangle net SOC_1.2VD_MT7628: 1590.94,362.01 1620.47,390.16
  rectangle net SOC_1.2VD_MT7628: 1564.17,229.13 1626.77,251.77
  region net GND: 2292.49,844.57 2292.49,868.23 2281.89,868.23 2281.89,844.57
  region net NetANT1_2: 2356.54,844.53 2356.54,868.13 2339.84,868.13 2339.84,844.53
  region net NetANT1_1: 2381.66,723.45 2326.55,723.45 2326.55,634.84 2381.66,634.84
  region net NetANT1_1: 2381.66,634.84 2361.98,634.84 2361.98,595.47 2381.66,595.47
  region net NetANT1_1: 2346.23,634.84 2326.54,634.84 2326.54,595.47 2346.23,595.47
  region net NetANT1_2: 2381.74,911.02 2354.19,911.02 2354.19,782.5 2381.74,782.5
  region net NetANT1_1: 2387.2,589.55 2387.2,595.47 2357.19,595.47 2357.19,589.55
  rectangle net SOC_1.2VD_MT7628: 1605.91,352.76 1614.57,363.19
  rectangle net GND: 722.05,617.91 753.54,697.83
  rectangle net GND: 722.24,336.22 753.74,400
  rectangle net GND: 722.44,453.54 753.94,498.62
  region net GND: 911.22,889.84 911.22,903.62 846.85,903.62 846.85,889.84
  region net GND: 886.81,120.51 886.81,134.29 808.07,134.29 808.07,120.51
  region net GND: 1035.83,120.59 1035.83,134.37 957.09,134.37 957.09,120.59
  region net GND: 1187.21,120.55 1187.21,134.33 1108.47,134.33 1108.47,120.55
  region net GND: 753.94,187.99 722.44,187.99 722.44,120.47 753.94,120.47
  region net GND: 753.74,861.42 722.24,861.42 722.24,782.68 753.74,782.68
  region: 2070.47,120.55 2070.47,134.33 1991.73,134.33 1991.73,120.55
  region: 2210.43,120.55 2210.43,134.33 2131.69,134.33 2131.69,120.55
  region: 2226.18,249.61 2194.69,249.61 2194.69,170.87 2226.18,170.87
  region: 2225.98,510.24 2194.49,510.24 2194.49,431.5 2225.98,431.5
  region: 2225.98,639.57 2194.49,639.57 2194.49,560.83 2225.98,560.83
  region: 2226.38,768.31 2194.88,768.31 2194.88,689.57 2226.38,689.57
  region: 2225.98,898.62 2194.49,898.62 2194.49,819.88 2225.98,819.88
  region: 2047.05,903.74 2047.05,889.96 2147.64,889.96 2147.64,903.74
  pour cut-out: 538.27,557.17 538.27,599.53 490.43,599.53 470.32,579.41 470.32,557.17
  pour cut-out: 433.74,822.18 425.67,822.18 425.67,871.7 429.12,875.15 431.83,875.15 433.74,873.24
  pour cut-out: 621.43,648.76 606.66,648.76 606.66,601.77 608.82,601.77 611.66,598.93 613.07,600.35 613.54,600.35 613.54,631.81
  pour cut-out: 620.31,474.21 614.47,468.37 616.54,466.3 616.54,463.37 654.28,463.37 654.67,462.98 654.67,444.85 655.65,443.87 656.74,444.96 661.69,444.96 661.69,473.26 660.75,474.21
  pour cut-out: 384.39,427.69 384.39,421.95 384.41,421.93 419.88,421.93 419.88,422.18 420.39,422.69 417.72,425.37 417.72,427.69
  pour cut-out: 268.15,553.39 268.07,553.31 268.07,470.63 288.94,470.63 289.02,470.71 289.02,553.5
  pour cut-out: 238.07,377.76 232.24,377.76 232.24,382.6 232.83,383.19 238.07,383.19
  pour cut-out: 1537.93,257.61 1529.81,257.61 1529.81,275.86 1531.53,277.58 1535.29,277.58 1537.93,274.94
  pour cut-out: 1480.61,280.32 1487.6,280.32 1487.6,295.2 1485.13,297.67 1482.13,297.67 1480.61,296.15
  pour cut-out: 238.19,659.65 232.28,659.65 232.28,654.21 238.19,654.21
  pour cut-out: 770.84,579.49 770.84,528.9 765.28,528.9 765.28,579.49
  pour cut-out: 654.59,560.17 660.75,560.17 660.75,607.79 655,607.79
  pour cut-out: 442.65,822.18 433.74,822.18 433.74,879.77 438.03,884.06 439.95,882.15 442.65,882.15
  pour cut-out: 1329.15,183.07 1322.83,183.07 1322.83,196.64 1329.15,196.64
  pour cut-out: 1346.06,254.72 1375.62,254.72 1372.25,258.1 1346.51,258.1 1346.06,257.65
  pour cut-out: 1464.43,194.75 1464.43,205.77 1472.17,205.77 1472.17,194.75
  pour cut-out: 1503.66,194.75 1503.66,208.43 1497.36,208.43 1497.36,194.75
  pour cut-out: 1575.59,194.75 1575.59,208.46 1569.29,208.46 1569.29,194.75
  pour cut-out: 1581.5,256.1 1609.45,256.1 1609.45,261.61 1581.5,261.61
  pour cut-out: 1864.37,859.84 1864.37,854.53 1860.86,854.53 1860.86,859.84
  pour cut-out: 1828.11,717.05 1830.08,717.05 1847.52,699.61 1851.38,703.46 1851.38,725.79 1861.14,735.55 1862.72,735.55 1862.72,746.1 1863.11,746.5 1852.4,746.5 1852.4,746.26 1827.95,721.81
  pour cut-out: 1960.94,454.94 1966.26,454.94 1966.26,460.79 1960.94,460.79
  pour cut-out: 1960.94,496.75 1960.94,490.91 1966.26,490.91 1966.26,496.75
  pour cut-out: 1957.35,563.78 1963.19,563.78 1963.19,535.83 1957.35,535.83
  pour cut-out: 1799.61,140.16 1799.61,236.61 1915.94,236.61 1915.94,140.16
  pour cut-out: 1727.09,219.06 1756.22,219.06 1756.22,250.55 1764.49,250.55 1764.49,273.39 1744.21,273.39 1744.21,250.55 1727.09,250.55
  pour cut-out: 1941.06,272.4 1986.34,272.4 1986.34,292.48 1941.06,292.48
  pour cut-out: 1941.06,232.44 1986.34,232.44 1986.34,252.52 1941.06,252.52
  pour cut-out: 1686.93,273.19 1686.93,227.91 1707.01,227.91 1707.01,273.19
  pour cut-out: 2381.78,910.43 2282.87,910.43 2282.88,910.43 2282.88,844.57 2282.84,844.53 2282.84,682.47 2282.94,682.37 2282.84,682.27 2282.84,595.47 2282.87,595.5 2381.7,595.5 2395.82,595.52 2395.82,910.42
  pour cut-out: 1799.61,236.61 1915.94,236.61 1915.94,140.16 1799.61,140.16
  pour cut-out: 1521.65,361.22 1521.65,233.07 1487.6,233.07 1487.6,361.22
Mid Layer 1:
  rectangle net SOC_1.2VD_MT7628: 1590.94,362.01 1620.47,390.16
  rectangle net SOC_1.2VD_MT7628: 1577.76,229.13 1615.94,251.77
  pour cut-out: 197.01,848.94 205.94,840 205.94,826.22 200.71,826.22 183.58,809.09 183.5,809.17 183.5,834.76 197.01,848.27
  pour cut-out: 2381.78,910.43 2282.87,910.43 2282.88,910.43 2282.88,844.57 2282.84,844.53 2282.84,682.47 2282.94,682.37 2282.84,682.27 2282.84,595.47 2282.87,595.5 2381.7,595.5 2395.82,595.52 2395.82,910.42
  pour cut-out: 1487.6,233.07 1564.17,233.07 1564.17,258.27 1513.98,258.27 1514.17,258.46 1514.17,268.31 1487.6,268.31
Mid Layer 2:
  pour cut-out: 770.47,668.9 770.47,651.1 760.67,641.3 325.11,641.3 199.21,515.4 199.21,228.35 188.43,228.35 184.21,224.13 184.21,521.61 318.9,656.3 754.72,656.3 758.66,660.24
  pour cut-out: 197.01,848.94 207.44,848.94 262.75,904.24 1430.31,904.24 1446.85,920.79 1448.5,919.13 1466.42,919.13 1436.38,889.09 268.81,889.09 205.94,826.22
  pour cut-out: 2381.78,910.43 2282.87,910.43 2282.88,910.43 2282.88,844.57 2282.84,844.53 2282.84,682.47 2282.94,682.37 2282.84,682.27 2282.84,595.47 2282.87,595.5 2381.7,595.5 2395.82,595.52 2395.82,910.42
Bottom Layer:
  pour cut-out: 1814.61,294.65 1814.61,298.39 1813.43,298.39 1813.43,294.72 1813.39,294.69
  pour cut-out: 1785.06,274.15 1785.08,274.13 1814.61,274.13 1814.61,294.65 1785.04,294.65
  pour cut-out: 2381.78,910.43 2282.87,910.43 2282.88,910.43 2282.88,844.57 2282.84,844.53 2282.84,682.47 2282.94,682.37 2282.84,682.27 2282.84,595.47 2282.87,595.5 2381.7,595.5 2395.82,595.52 2395.82,910.42

## Silkscreen, mask and mechanical layers (free items; w line width, h text height)
Top Overlay:
  text "VCC" at 884.25,996.3 h25 r270
  text "3V3" at 984.84,995.67 h25 r270
  text "GND" at 1086.22,996.46 h25 r270
  text "5V" at 784.25,983.86 h25 r270
  text "P3" at 1784.06,983.66 h25 r270
  text "P2" at 1884.25,983.66 h25 r270
  text "P1" at 1984.45,983.66 h25 r270
  text "P0" at 2084.25,983.86 h25 r270
  text "A5" at 182.36,982.91 h25 r270
  text "A4" at 284.53,982.72 h25 r270
  text "A3" at 384.53,982.72 h25 r270
  text "A2" at 484.72,982.91 h25 r270
  text "A1" at 584.53,983.11 h25 r270
  text "A0" at 684.53,983.31 h25 r270
  text "P9" at 1183.86,982.87 h25 r270
  text "P8" at 1284.25,982.68 h25 r270
  text "P7" at 1384.45,982.68 h25 r270
  text "P6" at 1484.25,983.07 h25 r270
  text "P5" at 1584.25,983.46 h25 r270
  text "P4" at 1684.45,983.46 h25 r270
  text "USB HOST" at 199.25,899.06 h25 r270
  text "MPU" at 388.78,811.57 h25 r270
  text "WiFi" at 389.17,551.22 h25 r270
  text "ON" at 45.79,522.68 h25
  text "WiFi" at 27.8,476.69 h25
  text "PWR/MCU" at 198.03,315.16 h25 r270
  text "MCU" at 389.17,278.23 h25 r270
  text "D13" at 484.92,209.57 h25 r270
  text "AREF" at 181.69,107.48 h25 r270
  text "RST" at 284.25,96.06 h25 r270
  text "D13" at 384.25,96.26 h25 r270
  text "D12" at 484.45,96.26 h25 r270
  text "D11" at 584.25,96.06 h25 r270
  text "D10" at 684.25,96.06 h25 r270
  text "D9" at 784.45,83.03 h25 r270
  text "D8" at 884.25,82.64 h25 r270
  text "D7" at 984.45,82.44 h25 r270
  text "D6" at 1084.45,82.44 h25 r270
  text "D5" at 1184.45,82.24 h25 r270
  text "D4" at 1284.25,82.05 h25 r270
  text "D3" at 1384.25,81.85 h25 r270
  text "D2" at 1484.25,81.65 h25 r270
  text "S0" at 2084.25,81.65 h25 r270
  text "D1" at 1584.25,81.46 h25 r270
  text "D0" at 1684.25,80.87 h25 r270
  text "S3" at 1784.25,81.06 h25 r270
  text "S2" at 1884.25,81.26 h25 r270
  text "S1" at 1984.45,81.46 h25 r270
Bottom Overlay:
  drawing of 10379 lines, arcs and shapes, not listed
  text "v1.0" at 571.85,858.5 h27.56 r180
Top Paste:
  rectangle: 2047.05,889.92 2147.64,903.78
  rectangle: 2194.49,819.88 2225.98,898.62
  rectangle: 2194.88,689.57 2226.38,768.31
  rectangle: 2194.49,560.83 2225.98,639.57
  rectangle: 2194.49,431.5 2225.98,510.24
  rectangle: 2194.68,170.87 2226.18,249.61
  rectangle: 2131.69,120.55 2210.43,134.33
  rectangle: 1991.73,120.55 2070.47,134.33
  rectangle: 1108.46,120.55 1187.2,134.33
  rectangle: 957.09,120.59 1035.83,134.37
  rectangle: 808.07,120.51 886.81,134.29
  rectangle: 722.44,120.47 753.94,187.99
  rectangle: 722.24,336.22 753.74,400
  rectangle: 722.05,617.91 753.54,697.83
  rectangle: 722.24,782.68 753.74,861.42
  rectangle: 846.85,889.84 911.22,903.66
Top Solder:
  rectangle: 2231.69,170.87 2254.68,194.61
  rectangle: 2231.5,486.5 2254.49,510.24
  rectangle: 2231.5,615.87 2254.49,639.61
  rectangle: 2231.85,744.57 2254.84,768.31
  rectangle: 2231.5,874.92 2254.49,898.66
  rectangle: 722.24,782.68 753.74,861.42
  rectangle: 2194.49,819.88 2225.98,898.62
  rectangle: 2194.88,689.57 2226.38,768.31
  rectangle: 2194.49,560.83 2225.98,639.57
  rectangle: 2194.49,431.5 2225.98,510.24
  rectangle: 2194.68,170.87 2226.18,249.61
  rectangle: 722.44,120.47 753.94,187.99
  rectangle: 722.24,336.22 753.74,400
  rectangle: 722.44,453.54 753.94,498.62
  rectangle: 722.05,617.91 753.54,697.83
  rectangle: 2131.69,120.55 2210.43,134.33
  rectangle: 1991.73,120.55 2070.47,134.33
  rectangle: 1108.5,120.55 1187.24,134.33
  region: 1035.83,134.37 957.09,134.37 957.09,120.59 1035.83,120.59
  region: 886.81,134.29 808.07,134.29 808.07,120.51 886.81,120.51
  rectangle: 2047.05,889.96 2147.64,903.74
  rectangle: 846.85,889.84 911.22,903.62
  region: 130.84,60.25 130.84,64.19 136.35,64.19 136.35,69.7 140.29,69.7 140.29,64.19 145.8,64.19 145.8,60.25 140.29,60.25 140.29,54.74 136.35,54.74 136.35,60.25
  lines w10: 2253.35,962.01 cw(c2253.45,962.11) 2253.35,962.21
Bottom Solder:
  region: 130.84,60.25 130.84,64.19 136.35,64.19 136.35,69.7 140.29,69.7 140.29,64.19 145.8,64.19 145.8,60.25 140.29,60.25 140.29,54.74 136.35,54.74 136.35,60.25
  lines w10: 2253.35,962.01 cw(c2253.45,962.11) 2253.35,962.21

## Text inside footprints (layer, text, board x,y; h text height)
J4: Bottom Overlay "VIO" at 2272.59,245.66 h19.68 r180; Bottom Overlay "DINT" at 2265.74,322.71 h19.68 r180; Bottom Overlay "PORST_N" at 2235.19,403.66 h19.68 r180; Bottom Overlay "CLK" at 2270.29,480.71 h19.68 r180; Bottom Overlay "TMS" at 2270.29,560.86 h19.68 r180; Bottom Overlay "TDO" at 2271.09,639.51 h19.68 r180; Bottom Overlay "TDI" at 2271.09,718.11 h19.68 r180; Bottom Overlay "RST_N" at 2255.04,795.21 h19.68 r180